# EAGLE board main (EAGLE 9.6.1)
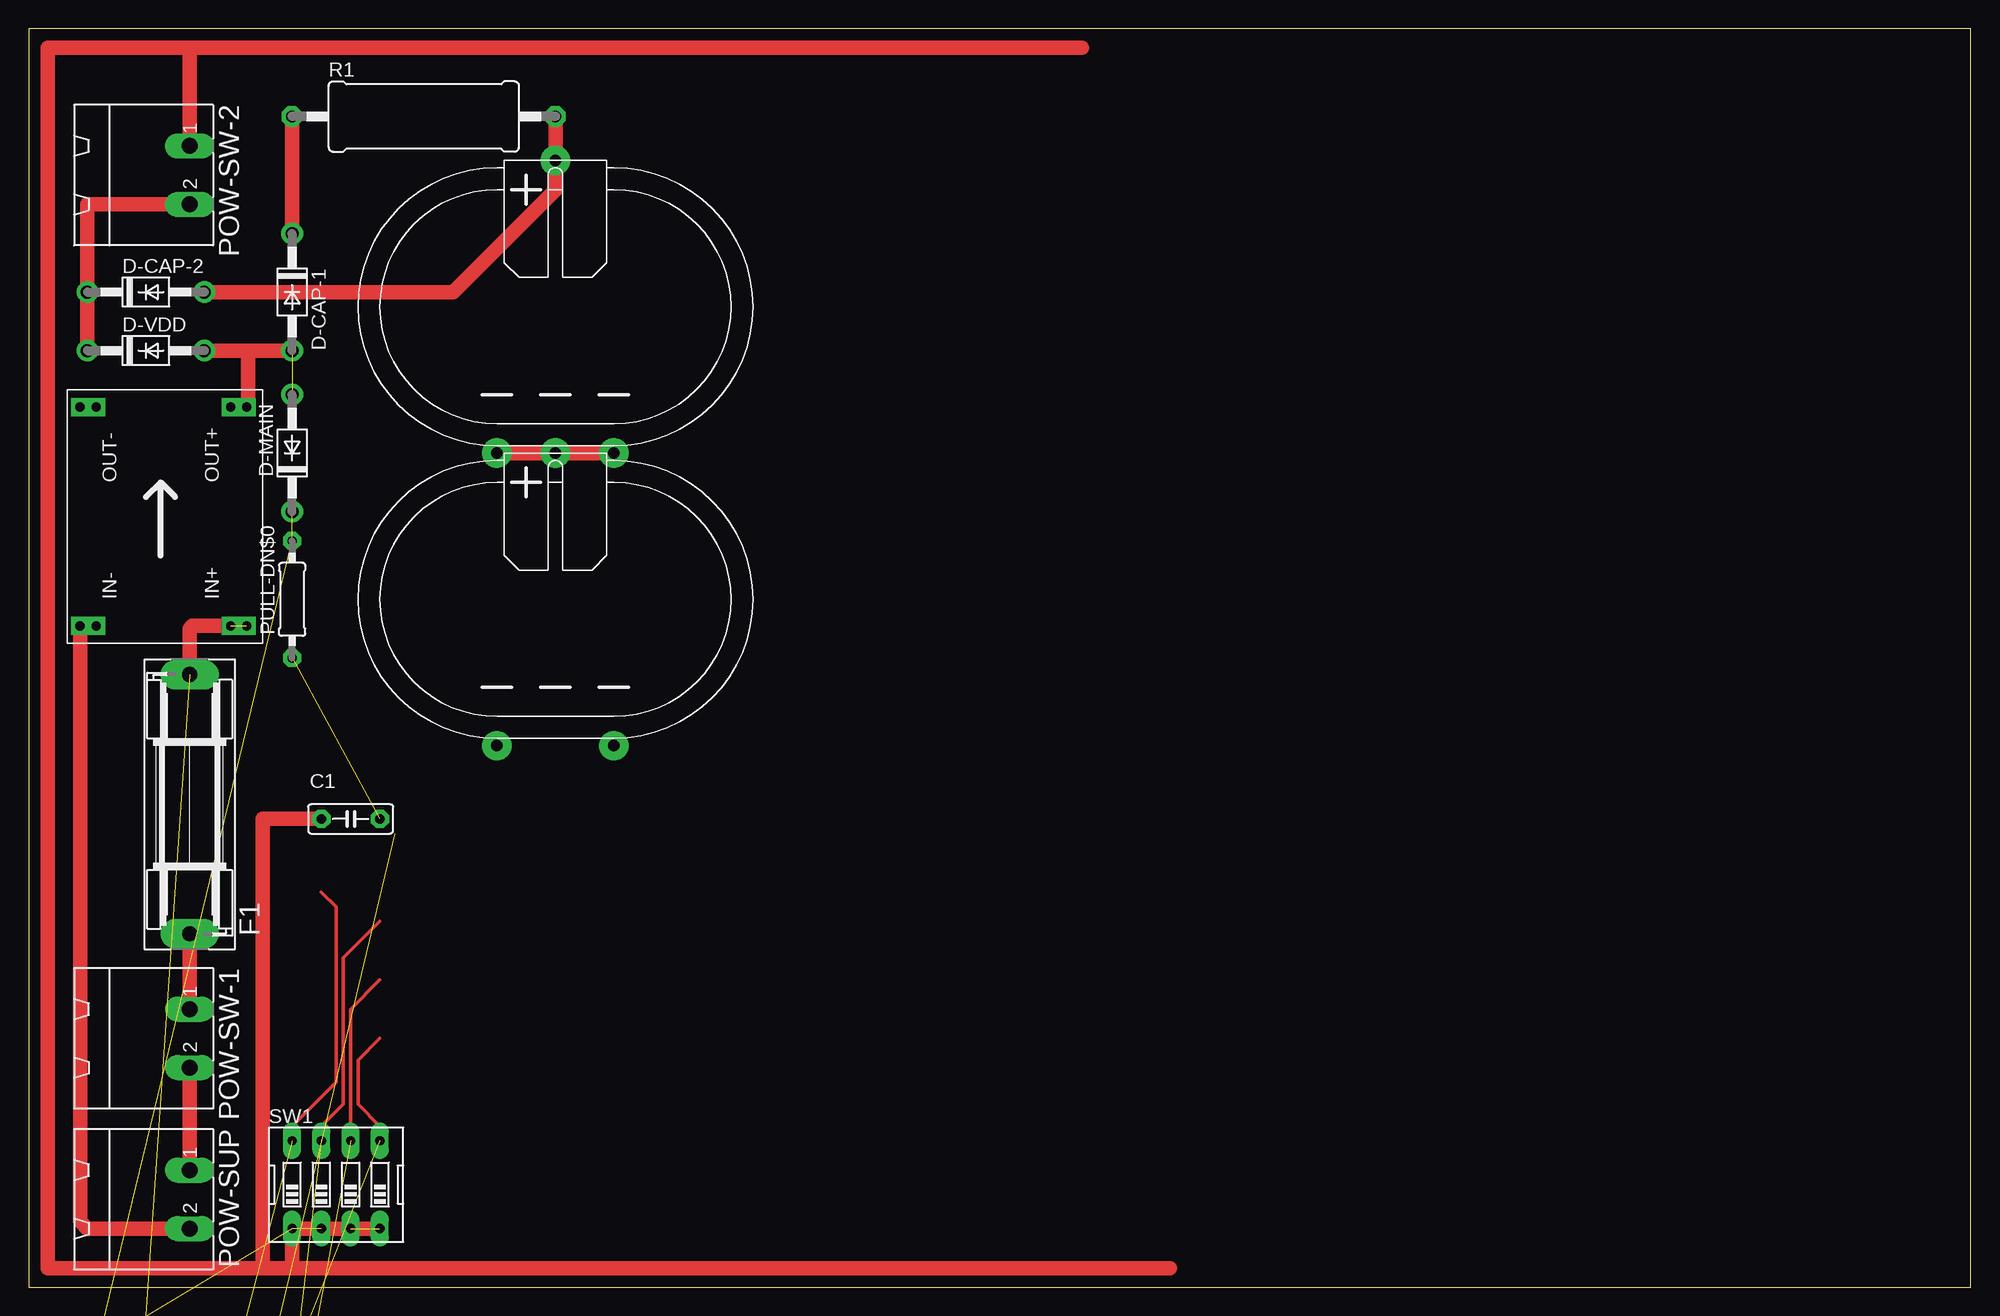
[diagram p0: board, top side]
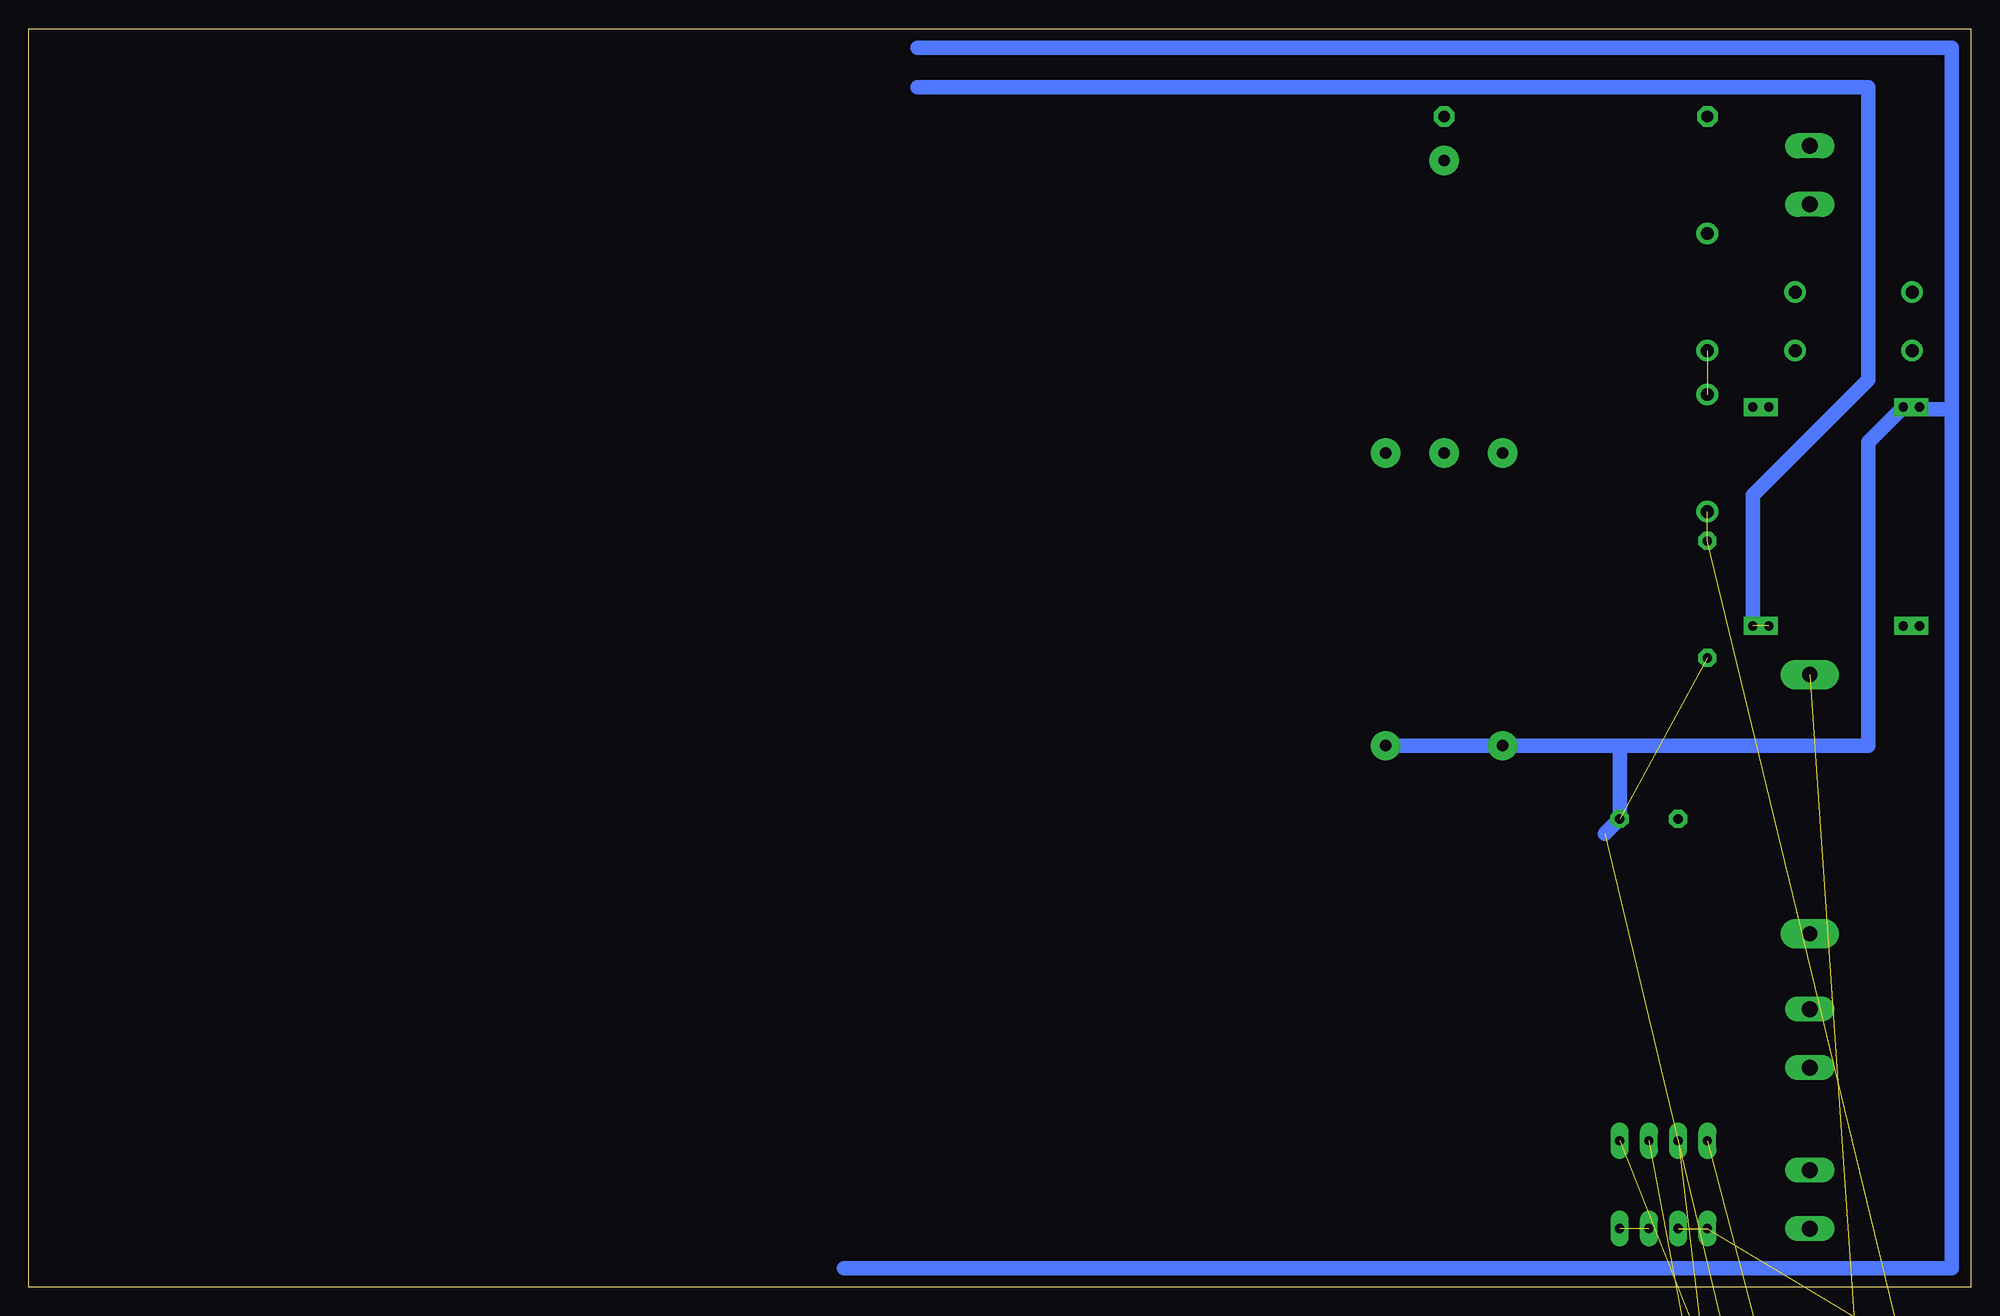
[diagram p1: board, bottom side, seen from below]

Size 168.58 x 109.21 mm. Coordinates in mm from the lower left corner, seen from the top.
Outline: 0,0 168.58,0 168.58,109.21 0,109.21 0,0
Copper layers (1*16): Top 0.035mm / dielectric 1.5mm / Bottom 0.035mm
Design rules "default *": minimum track width 6mil, minimum drill 0.35mm, track to track 6mil, track to pad 6mil, pad to pad 6mil, via to via 6mil, smd to smd 6mil, copper to edge 40mil, drill to drill 6mil, minimum pad ring 15mil, minimum via ring 8mil, stop-mask expansion 4mil, vias tented up to drill 0mil, thermal gap 10mil

## Footprints (pad centres in the part's own frame; a part is rotated, then mirrored left to right if it is on the bottom)
DIL16 = drill 0.813 long: 1 -8.89,-3.81; 2 -6.35,-3.81; 3 -3.81,-3.81; 4 -1.27,-3.81; 5 1.27,-3.81; 6 3.81,-3.81; 7 6.35,-3.81; 8 8.89,-3.81; 9 8.89,3.81; 10 6.35,3.81; 11 3.81,3.81; 12 1.27,3.81; 13 -1.27,3.81; 14 -3.81,3.81; 15 -6.35,3.81; 16 -8.89,3.81
E3,5-8 = drill 0.813 pad 1.6: + -1.778,0 | drill 0.813 pad 1.6 octagon: - 1.778,0
TO92 = drill 0.813 octagon: 1 1.27,0; 2 0,1.905; 3 -1.27,0
0207/12 = drill 0.813 octagon: 1 -6.35,0; 2 6.35,0
LI10 = drill 1.321 octagon: A -2.54,-5.08; E 2.54,-5.08; S 0,5.08
C050-025X075 = drill 0.813 octagon: 1 -2.54,0; 2 2.54,0
C025-025X050 = drill 0.813 octagon: 1 -1.27,0; 2 1.27,0
CK103X04 = drill 1.321 octagon: A -2.87,-2.87; A1 -2.845,-10.617; A2 -7.772,-7.772; A3 -10.617,-2.845; A4 -10.617,2.845; B 0,4.059; B1 -7.772,7.772; B2 -2.845,10.617; B3 2.845,10.617; B4 7.772,7.772; C 2.87,-2.87; C1 10.617,2.845; C2 10.617,-2.845; C3 7.772,-7.772; C4 2.845,-10.617
ML14 = drill 0.914 octagon: 1 -7.62,-1.27; 2 -7.62,1.27; 3 -5.08,-1.27; 4 -5.08,1.27; 5 -2.54,-1.27; 6 -2.54,1.27; 7 0,-1.27; 8 0,1.27; 9 2.54,-1.27; 10 2.54,1.27; 11 5.08,-1.27; 12 5.08,1.27; 13 7.62,-1.27; 14 7.62,1.27
DO35-10 = drill 0.813 long: A 5.08,0; C -5.08,0
DO41-10 = drill 1.118: A 5.08,0; C -5.08,0
0207/10 = drill 0.813 octagon: 1 -5.08,0; 2 5.08,0
SH22,5 = drill 1.321 pad 2.54 long: 1 -11.252,0; 2 11.252,0
DIL08 = drill 0.813 pad 1.27: 1 -3.81,-3.81; 2 -1.27,-3.81; 3 1.27,-3.81; 4 3.81,-3.81; 5 3.81,3.81; 6 1.27,3.81; 7 -1.27,3.81; 8 -3.81,3.81
DIL14 = drill 0.813 long: 1 -7.62,-3.81; 2 -5.08,-3.81; 3 -2.54,-3.81; 4 0,-3.81; 5 2.54,-3.81; 6 5.08,-3.81; 7 7.62,-3.81; 8 7.62,3.81; 9 5.08,3.81; 10 2.54,3.81; 11 0,3.81; 12 -2.54,3.81; 13 -5.08,3.81; 14 -7.62,3.81
VT400 = drill 0.8 pad 1.4: 1 -3.81,0; 2 3.81,0
MSTBA2 = drill 1.397 long: 1 -2.54,5.08; 2 2.54,5.08
LED5MM = drill 0.813 octagon: A -1.27,0; K 1.27,0
TO92-EBC = drill 0.813 long: B 0,-1.27; C -2.54,-1.27; E 2.54,-1.27
TC26V = drill 0.813: 1 -1.27,0; 2 1.27,0
0617/22 = drill 1.016 octagon: 1 -11.43,0; 2 11.43,0
RACON12 = drill 1.194 long: 1 -6.248,2.489; 2 6.248,2.489; 3 -6.248,-2.489; 4 6.248,-2.489
HVC90F = drill 1 pad 2.54: MINUS$1 -5.08,12.7; MINUS$2 5.08,12.7; PLUS$1 0,-12.7
EDG-04 = drill 0.813 long: 1 -3.81,-3.81; 2 -1.27,-3.81; 3 1.27,-3.81; 4 3.81,-3.81; 5 3.81,3.81; 6 1.27,3.81; 7 -1.27,3.81; 8 -3.81,3.81
TO92-CBE = drill 0.813 long: B 0,0; C -2.54,0; E 2.54,0
DC-BRICK = drill 0.8 square: IN1+ 1.5,1.4; IN1- 1.5,14.47; IN2+ 1.5,2.8; IN2- 1.5,15.87; OUT1+ 20.5,1.4; OUT1- 20.5,14.47; OUT2+ 20.5,2.8; OUT2- 20.5,15.87

## Placement (x,y rotation side)
12H-  4520N  [DIL16]  -39.37,-488.95 0 top  (outside the outline)
12H-CS-IC  4028N  [DIL16]  -39.37,-681.99 0 top  (outside the outline)
AUTORESET-C1  10uF  [E3,5-8]  -48.26,-252.73 0 top  (outside the outline)
AUTORESET-Q1  BC547  [TO92]  -49.53,-266.7 0 top  (outside the outline)
AUTORESET-R1  100K  [0207/12]  -44.45,-271.78 0 top  (outside the outline)
AUTORESET-R2  10K  [0207/12]  -44.45,-276.86 0 top  (outside the outline)
BRI-MAX  [LI10]  -45.72,-223.52 0 top  (outside the outline)
BRI-MIN  [LI10]  -45.72,-238.76 0 top  (outside the outline)
C1  100n  [C050-025X075]  27.94,40.64 0 top
C2  100n  [C050-025X075]  5.08,-31.75 0 top  (outside the outline)
C3  100n  [C050-025X075]  5.08,-36.83 0 top  (outside the outline)
C4  100n  [C050-025X075]  -36.83,-172.72 0 top  (outside the outline)
C5  100n  [C050-025X075]  -36.83,-203.2 0 top  (outside the outline)
C6  100n  [C050-025X075]  -48.26,-422.91 0 top  (outside the outline)
C7  100n  [C050-025X075]  -48.26,-430.53 0 top  (outside the outline)
C8  100n  [C050-025X075]  -48.26,-438.15 0 top  (outside the outline)
C9  100n  [C050-025X075]  -48.26,-533.4 0 top  (outside the outline)
C10  100n  [C050-025X075]  -48.26,-541.02 0 top  (outside the outline)
C11  100n  [C050-025X075]  -48.26,-548.64 0 top  (outside the outline)
C12  100n  [C050-025X075]  -48.26,-556.26 0 top  (outside the outline)
C13  100n  [C050-025X075]  -48.26,-563.88 0 top  (outside the outline)
C14  100n  [C050-025X075]  -48.26,-571.5 0 top  (outside the outline)
C15  100n  [C050-025X075]  -48.26,-704.85 0 top  (outside the outline)
C16  100n  [C050-025X075]  -48.26,-712.47 0 top  (outside the outline)
CLK-C1  10pf  [C025-025X050]  -5.08,-396.24 0 top  (outside the outline)
CLK-C2  10pf  [C025-025X050]  -49.53,-410.21 0 top  (outside the outline)
CLK-DIVIDER-1  4520N  [DIL16]  -39.37,-386.08 0 top  (outside the outline)
CLK-DIVIDER-2  4520N  [DIL16]  -16.51,-386.08 0 top  (outside the outline)
CLK-R1  10M  [0207/12]  -27.94,-408.94 0 top  (outside the outline)
CLK-R2  10M  [0207/12]  -12.7,-408.94 0 top  (outside the outline)
CLK-R3  330K  [0207/12]  -44.45,-417.83 0 top  (outside the outline)
CLK-SPEED-SELECTOR  [CK103X04]  -38.1,-361.95 0 top  (outside the outline)
CON-HAND-A  [ML14]  -38.1,-723.9 0 top  (outside the outline)
CON-HAND-B  [ML14]  -38.1,-736.6 0 top  (outside the outline)
CON-HAND-C  [ML14]  -38.1,-749.3 0 top  (outside the outline)
CON-SEC  [ML14]  -38.1,-594.36 0 top  (outside the outline)
CON-SEC1  [ML14]  -38.1,-621.03 0 top  (outside the outline)
CON-SEC2  [ML14]  -38.1,-633.73 0 top  (outside the outline)
D1  1N4148DO35-10  [DO35-10]  -33.02,-120.65 0 top  (outside the outline)
D2  1N4148DO35-10  [DO35-10]  -33.02,-127 0 top  (outside the outline)
D3  1N4148DO35-10  [DO35-10]  -33.02,-133.35 0 top  (outside the outline)
D4  1N4148DO35-10  [DO35-10]  -33.02,-139.7 0 top  (outside the outline)
D5  1N4148DO35-10  [DO35-10]  -33.02,-146.05 0 top  (outside the outline)
D6  1N4148DO35-10  [DO35-10]  -33.02,-152.4 0 top  (outside the outline)
D7  1N4148DO35-10  [DO35-10]  -33.02,-158.75 0 top  (outside the outline)
D8  1N4148DO35-10  [DO35-10]  -33.02,-165.1 0 top  (outside the outline)
D-CAP-1  1N4004  [DO41-10]  22.86,86.36 270 top
D-CAP-2  1N4004  [DO41-10]  10.16,86.36 0 top
D-MAIN  1N4004  [DO41-10]  22.86,72.39 90 top
D-VDD  1N4004  [DO41-10]  10.16,81.28 0 top
DIV$1  1K  [0207/10]  6.35,-74.93 0 top  (outside the outline)
DIV$2  1K  [0207/10]  -45.72,-210.82 0 top  (outside the outline)
DIV$3  1K  [0207/10]  -45.72,-215.9 0 top  (outside the outline)
F1  [SH22,5]  13.97,41.91 90 top
HOUR-  4518N  [DIL16]  -39.37,-477.52 0 top  (outside the outline)
HOUR-C  100n  [C025-025X050]  -43.18,-331.47 0 top  (outside the outline)
IC1  TL072P  [DIL08]  -33.02,-179.07 0 top  (outside the outline)
IC2  4071N  [DIL14]  11.43,-10.16 0 top  (outside the outline)
IC3  4081N  [DIL14]  11.43,-21.59 0 top  (outside the outline)
IC4  4071N  [DIL14]  11.43,-44.45 0 top  (outside the outline)
IC5  4001N  [DIL14]  -40.64,-580.39 0 top  (outside the outline)
IC9  4081N  [DIL14]  -40.64,-500.38 0 top  (outside the outline)
IC10  4071N  [DIL14]  -40.64,-511.81 0 top  (outside the outline)
IC11  4030N  [DIL14]  -40.64,-523.24 0 top  (outside the outline)
INVERTER-  4069N  [DIL14]  -40.64,-400.05 0 top  (outside the outline)
MIN-  4518N  [DIL16]  -39.37,-466.09 0 top  (outside the outline)
MIN-CS-IC  4028N  [DIL16]  -39.37,-670.56 0 top  (outside the outline)
PH1  VT43N1  [VT400]  -46.99,-199.39 0 top  (outside the outline)
POW-SUP  MSTBA2  [MSTBA2]  8.89,7.62 270 top
POW-SW-1  MSTBA2  [MSTBA2]  8.89,21.59 270 top
POW-SW-2  MSTBA2  [MSTBA2]  8.89,96.52 270 top
POWER-LED  [LED5MM]  -48.26,-260.35 0 top  (outside the outline)
POWER-LED-R  270  [0207/12]  -44.45,-281.94 0 top  (outside the outline)
PULL-DN$0  [0207/10]  22.86,59.69 90 top
PULL-DN$1  [0207/10]  6.35,-54.61 0 top  (outside the outline)
PULL-DN$2  [0207/10]  6.35,-59.69 0 top  (outside the outline)
PULL-DN$3  [0207/10]  6.35,-64.77 0 top  (outside the outline)
PULL-DN$4  [0207/10]  6.35,-69.85 0 top  (outside the outline)
PWR-TRI-R  1K  [0207/10]  -45.72,-650.24 0 top  (outside the outline)
PWR-TRI-R1  1K  [0207/10]  -45.72,-662.94 0 top  (outside the outline)
PWR-TRI-R2  1K  [0207/10]  -45.72,-699.77 0 top  (outside the outline)
Q1  BC557  [TO92-EBC]  -5.08,-100.33 0 top  (outside the outline)
Q8  32768Hz  [TC26V]  -41.91,-408.94 0 top  (outside the outline)
R1  [0617/22]  34.29,101.6 0 top
R2  570K  [0207/12]  -26.67,-330.2 0 top  (outside the outline)
R4  570K  [0207/12]  -44.45,-339.09 0 top  (outside the outline)
R$1  180  [0207/10]  -11.43,-110.49 0 top  (outside the outline)
R$2  180  [0207/10]  -11.43,-115.57 0 top  (outside the outline)
R$3  4K  [0207/10]  -34.29,-187.96 0 top  (outside the outline)
R$4  4K  [0207/10]  -34.29,-193.04 0 top  (outside the outline)
R$5  4K  [0207/10]  -34.29,-198.12 0 top  (outside the outline)
RESET-C  100n  [C025-025X050]  -36.83,-331.47 0 top  (outside the outline)
S-HOUR  RACON12  [RACON12]  -43.18,-292.1 0 top  (outside the outline)
S-MIN  RACON12  [RACON12]  -25.4,-292.1 0 top  (outside the outline)
S-MIN-C  100n  [C025-025X050]  -19.05,-317.5 0 top  (outside the outline)
S-MIN-R  570K  [0207/12]  -29.21,-339.09 0 top  (outside the outline)
S-RESET  RACON12  [RACON12]  -43.18,-307.34 0 top  (outside the outline)
S-SCHMITT  40106N  [DIL14]  -40.64,-321.31 0 top  (outside the outline)
S-SEC  RACON12  [RACON12]  -25.4,-307.34 0 top  (outside the outline)
S-SEC-C  100n  [C025-025X050]  -27.94,-317.5 0 top  (outside the outline)
S-SEC-R  570K  [0207/12]  -44.45,-344.17 0 top  (outside the outline)
SEC-  4518N  [DIL16]  -39.37,-454.66 0 top  (outside the outline)
SUPER-C1  HVC90F  [HVC90F]  45.72,85.09 180 top
SUPER-C2  HVC90F  [HVC90F]  45.72,59.69 180 top
SW1  [EDG-04]  26.67,8.89 0 top
T1  [TO92-CBE]  -13.97,-101.6 0 top  (outside the outline)
T2  [TO92-CBE]  -48.26,-643.89 0 top  (outside the outline)
T3  [TO92-CBE]  -48.26,-656.59 0 top  (outside the outline)
T4  [TO92-CBE]  -48.26,-693.42 0 top  (outside the outline)
TRI-FALL  [LI10]  -35.56,-107.95 0 top  (outside the outline)
TRI-RISE  [LI10]  -24.13,-107.95 0 top  (outside the outline)
U$1  MP1584  [DC-BRICK]  20.32,55.88 90 top

## Library data of the parts
12H- CLK-DIVIDER-1 CLK-DIVIDER-2 HOUR- MIN- SEC- = 45xx
12H-CS-IC IC2-IC5 IC9-IC11 INVERTER- MIN-CS-IC S-SCHMITT = 40xx
AUTORESET-C1 C1-C16 CLK-C1 CLK-C2 HOUR-C RESET-C S-MIN-C S-SEC-C = rcl; SPICEPREFIX: C
AUTORESET-Q1 = transistor-npn
AUTORESET-R1 AUTORESET-R2 CLK-R1-CLK-R3 DIV$1-DIV$3 POWER-LED-R PULL-DN$0 PULL-DN$1-PULL-DN$4 PWR-TRI-R PWR-TRI-R1 PWR-TRI-R2 R1 R2 R4 R$1-R$5 S-MIN-R S-SEC-R = rcl; SPICEPREFIX: R
BRI-MAX BRI-MIN TRI-FALL TRI-RISE = pot
CLK-SPEED-SELECTOR = switch
CON-HAND-A CON-HAND-B CON-HAND-C CON-SEC CON-SEC1 CON-SEC2 = con-harting-ml; OC_FARNELL: unknown; OC_NEWARK: unknown
D1-D8 D-CAP-1 D-CAP-2 D-MAIN D-VDD = diode
F1 = fuse; MF: SCHURTER; MPN: 0031.8201; OC_FARNELL: 1162740; OC_NEWARK: 96F8317
IC1 = linear
PH1 = photo-elements
POW-SUP POW-SW-1 POW-SW-2 = con-phoenix-508; MF: FARNELL; MPN: 1757242; OC_FARNELL: 3705171; OC_NEWARK: 71C4161
POWER-LED = led
Q1 = transistor-pnp
Q8 = crystal
S-HOUR S-MIN S-RESET S-SEC = switch-misc
SUPER-C1 SUPER-C2 = HVC90F
SW1 = special
T1-T4 = transistor
U$1 = MP1584-dc-brick

## Nets
0.5HZ: CLK-DIVIDER-2.14
0V-EXT: POW-SUP.2 U$1.IN1- U$1.IN2-
1HZ: CLK-DIVIDER-2.13 CLK-SPEED-SELECTOR.A2 IC2.8
2HZ: CLK-DIVIDER-2.12 CLK-SPEED-SELECTOR.A3
4HZ: CLK-DIVIDER-2.11 CLK-SPEED-SELECTOR.A4
8HZ: CLK-DIVIDER-2.6 CLK-DIVIDER-2.10 CLK-SPEED-SELECTOR.B1
9V: CON-SEC1.14 CON-SEC2.14 CON-SEC.14 F1.2 U$1.IN1+ U$1.IN2+
9V-EXT: POW-SUP.1 POW-SW-1.2
9V-IN: F1.1 POW-SW-1.1
12H-A: 12H-.3 12H-CS-IC.10
12H-B: 12H-.4 12H-CS-IC.13
12H-C: 12H-.5 IC9.12
12H-CS-A: 12H-CS-IC.3
12H-CS-B: 12H-CS-IC.14
12H-CS-C: 12H-CS-IC.2
12H-D: 12H-.6 IC9.13
16HZ: CLK-DIVIDER-2.5 CLK-SPEED-SELECTOR.B2
32HZ: CLK-DIVIDER-2.4 CLK-SPEED-SELECTOR.B3
64HZ: CLK-DIVIDER-2.3 CLK-SPEED-SELECTOR.B4
128HZ: CLK-DIVIDER-1.14 CLK-DIVIDER-2.2 CLK-SPEED-SELECTOR.C1
256HZ: CLK-DIVIDER-1.13 CLK-SPEED-SELECTOR.C2
512HZ: CLK-DIVIDER-1.12 CLK-SPEED-SELECTOR.C3
1024HZ: CLK-DIVIDER-1.11 CLK-SPEED-SELECTOR.C4
2048HZ: CLK-DIVIDER-1.6 CLK-DIVIDER-1.10
4096HZ: CLK-DIVIDER-1.5
8192HZ: CLK-DIVIDER-1.4
16384HZ: CLK-DIVIDER-1.3
ALW: IC2.2 IC4.3
AUTO-R: AUTORESET-Q1.3 AUTORESET-R2.2 IC2.13
BLI: IC2.9 IC4.10
BRI: IC2.6 IC4.4
BRI-REF: BRI-MIN.E IC1.6 PH1.2
BTN-HOUR: IC11.9 S-SCHMITT.6
BTN-MIN: IC11.6 S-SCHMITT.4
BTN-RESET: IC2.12 S-SCHMITT.8
BTN-SEC: IC11.2 S-SCHMITT.2
CLK: CLK-SPEED-SELECTOR.A CLK-SPEED-SELECTOR.B CLK-SPEED-SELECTOR.C IC11.1
CLK-C2-R3: CLK-C2.1 CLK-R3.2 Q8.2
COL: IC3.4
GND-7SEG: CON-SEC1.10 CON-SEC1.13 CON-SEC2.10 CON-SEC2.13 CON-SEC.10 CON-SEC.13 T3.C
GND-HAND: 12H-CS-IC.8 12H-CS-IC.11 12H-CS-IC.12 C15.2 C16.2 MIN-CS-IC.8 MIN-CS-IC.11 T4.C
GND-TRI: C4.2 C5.2 D4.C DIV$3.1 IC1.4 R$2.1 R$4.1 T2.C
HOUR-ONE-A: CON-SEC2.8 HOUR-.3
HOUR-ONE-B: CON-SEC2.6 HOUR-.4
HOUR-ONE-C: CON-SEC2.4 HOUR-.5 IC9.8
HOUR-ONE-D: CON-SEC2.2 HOUR-.6 HOUR-.10
HOUR-TEN-A: CON-SEC2.7 HOUR-.11 IC5.1
HOUR-TEN-B: CON-SEC2.5 HOUR-.12 IC5.2 IC9.9
HOUR-TEN-CD: CON-SEC2.1 CON-SEC2.3 IC3.10
MAIN: D-MAIN.C IC2.1 PULL-DN$0.2
MIN-CS-A: MIN-CS-IC.3
MIN-CS-B: MIN-CS-IC.14
MIN-CS-C: MIN-CS-IC.2
MIN-CS-D: MIN-CS-IC.15
MIN-CS-E: MIN-CS-IC.1
MIN-CS-F: MIN-CS-IC.6
MIN-ONE-A: CON-SEC1.8 MIN-.3
MIN-ONE-B: CON-SEC1.6 MIN-.4
MIN-ONE-C: CON-SEC1.4 MIN-.5
MIN-ONE-D: CON-SEC1.2 MIN-.6 MIN-.10
MIN-TEN-A: CON-SEC1.7 MIN-.11 MIN-CS-IC.10
MIN-TEN-B: CON-SEC1.5 IC9.5 MIN-.12 MIN-CS-IC.13
MIN-TEN-C: CON-SEC1.3 IC9.6 MIN-.13 MIN-CS-IC.12
MIN-TEN-D: CON-SEC1.1 MIN-.14
N$1: IC4.12 IC4.13 PULL-DN$3.2 SW1.8
N$2: IC4.8 IC4.9 PULL-DN$2.2 SW1.7
N$3: IC4.5 IC4.6 PULL-DN$1.2 SW1.6
N$4: D-CAP-1.A D-MAIN.A D-VDD.A U$1.OUT1+ U$1.OUT2+
N$5: D-CAP-1.C R1.1
N$6: D-CAP-2.A R1.2 SUPER-C1.PLUS$1
N$7: SUPER-C1.MINUS$1 SUPER-C1.MINUS$2 SUPER-C2.PLUS$1
N$8: IC4.1 IC4.2 PULL-DN$4.2 SW1.5
N$9: IC2.4 IC3.2
N$10: IC2.10 IC3.6
N$14: D1.C D2.A
N$15: IC1.3 R$3.1 R$4.2 R$5.2
N$16: D2.C DIV$1.2 Q1.B
N$17: D3.A DIV$1.1 T1.B
N$18: R$1.1 TRI-RISE.E
N$19: T1.E TRI-FALL.E
N$20: Q1.E TRI-RISE.S
N$21: R$2.2 TRI-FALL.S
N$23: D6.C D8.C T1.C
N$24: D5.A D7.A Q1.C
N$25: D3.C D4.A
N$26: BRI-MAX.E DIV$2.1
N$27: BRI-MAX.S PH1.1
N$28: BRI-MIN.S DIV$3.2
N$29: D5.C D8.A IC1.1 R$5.1
N$31: S-SCHMITT.1 S-SEC-C.2 S-SEC-R.1 S-SEC.1
N$32: S-MIN-C.2 S-MIN-R.1 S-MIN.1 S-SCHMITT.3
N$33: HOUR-C.2 R4.1 S-HOUR.1 S-SCHMITT.5
N$37: RESET-C.1 S-RESET.3
N$38: S-MIN-C.1 S-MIN.3
N$40: R2.1 RESET-C.2 S-RESET.1 S-SCHMITT.9
N$41: PWR-TRI-R.1 T2.B
N$43: PWR-TRI-R1.1 T3.B
N$44: PWR-TRI-R2.1 T4.B
N$46: CLK-DIVIDER-1.2 INVERTER-.4
N$49: 12H-.7 IC10.11
N$50: IC9.10 IC10.8
N$51: IC9.3 IC10.1 IC11.5
N$52: IC10.2 IC10.4 MIN-.7 MIN-.15
N$53: IC9.4 IC10.5 IC11.8
N$54: IC9.11 IC10.13
N$55: HOUR-.7 HOUR-.15 IC10.6 IC10.10
N$56: IC11.3 SEC-.2
N$57: IC10.3 SEC-.7 SEC-.15
N$58: CLK-R1.1 CLK-R2.2
N$59: IC11.4 MIN-.2
N$60: 12H-.2 HOUR-.2 IC11.10
N$72: AUTORESET-C1.+ AUTORESET-Q1.2 AUTORESET-R1.2
N$84: IC3.9 IC5.3
N$97: POWER-LED-R.2 POWER-LED.A
N-BL: CON-SEC1.11 CON-SEC2.11 CON-SEC.11 IC3.3 IC3.5
PWM: IC1.7 IC2.5
PWR: IC2.3 IC3.1 PWR-TRI-R1.2 PWR-TRI-R2.2 PWR-TRI-R.2
RESET: IC2.11 IC10.9 IC10.12
SEC-ONE-A: CON-SEC.8 SEC-.3
SEC-ONE-B: CON-SEC.6 SEC-.4
SEC-ONE-C: CON-SEC.4 SEC-.5
SEC-ONE-D: CON-SEC.2 SEC-.6 SEC-.10
SEC-TEN-A: CON-SEC.7 SEC-.11
SEC-TEN-B: CON-SEC.5 IC9.1 SEC-.12
SEC-TEN-C: CON-SEC.3 IC9.2 SEC-.13
SEC-TEN-D: CON-SEC.1 SEC-.14
SIGNAL-CLK-XTAL-1: CLK-C1.1 CLK-R1.2 INVERTER-.1 Q8.1
SIGNAL-CLK-XTAL-2: CLK-R2.1 CLK-R3.1 INVERTER-.2 INVERTER-.3
TRI-WAVE: C4.1 D6.A D7.C IC1.2 IC1.5
VDD: 12H-.16 12H-CS-IC.16 AUTORESET-R1.1 AUTORESET-R2.1 C1.1 C2.1 C3.1 C5.1 C6.1 C7.1 C8.1 C9.1 C10.1 C11.1 C12.1 C13.1 C14.1 C15.1 C16.1 CLK-DIVIDER-1.16 CLK-DIVIDER-2.16 CON-SEC1.9 CON-SEC1.12 CON-SEC2.9 CON-SEC2.12 CON-SEC.9 CON-SEC.12 D1.A DIV$2.2 HOUR-.16 HOUR-C.1 IC1.8 IC2.14 IC3.14 IC4.14 IC5.14 IC9.14 IC10.14 IC11.14 INVERTER-.14 MIN-.16 MIN-CS-IC.16 POW-SW-2.1 POWER-LED-R.1 R$1.2 R$3.2 S-HOUR.3 S-SCHMITT.14 S-SEC-C.1 S-SEC.3 SEC-.16 SW1.1 SW1.2 SW1.3 SW1.4
VDD-IN: D-CAP-2.C D-VDD.C POW-SW-2.2
VSS: 12H-.8 AUTORESET-C1.- AUTORESET-Q1.1 C1.2 C2.2 C3.2 C6.2 C7.2 C8.2 C9.2 C10.2 C11.2 C12.2 C13.2 C14.2 CLK-C1.2 CLK-C2.2 CLK-DIVIDER-1.1 CLK-DIVIDER-1.7 CLK-DIVIDER-1.8 CLK-DIVIDER-1.9 CLK-DIVIDER-1.15 CLK-DIVIDER-2.1 CLK-DIVIDER-2.7 CLK-DIVIDER-2.8 CLK-DIVIDER-2.9 CLK-DIVIDER-2.15 CLK-SPEED-SELECTOR.A1 HOUR-.1 HOUR-.8 HOUR-.9 IC2.7 IC3.7 IC4.7 IC5.7 IC9.7 IC10.7 IC11.7 INVERTER-.7 MIN-.1 MIN-.8 MIN-.9 POWER-LED.K PULL-DN$0.1 PULL-DN$1.1 PULL-DN$2.1 PULL-DN$3.1 PULL-DN$4.1 R2.2 R4.2 S-MIN-R.2 S-SCHMITT.7 S-SEC-R.2 SEC-.1 SEC-.8 SEC-.9 SUPER-C2.MINUS$1 SUPER-C2.MINUS$2 T2.E T3.E T4.E U$1.OUT1- U$1.OUT2-
ZER: IC3.8 IC4.11

## Tracks (layer width: path | path; a pad name or v marks a point on that pad's centre or on a via)
0V-EXT
  Top 1.27: U$1.IN1- U$1.IN2- 4.45,5.71 5.08,5.08 POW-SUP.2
1HZ  (2 unrouted)
2HZ  (1 unrouted)
4HZ  (1 unrouted)
8HZ  (2 unrouted)
9V  (4 unrouted)
  Top 1.27: F1.2 13.97,57.15 14.2,57.38 U$1.IN1+
  Bottom 1.27: U$1.IN1+ 18.92,68.71 8.89,78.74 8.89,104.14 91.44,104.14
9V-EXT
  Top 1.27: POW-SUP.1 POW-SW-1.2
9V-IN
  Top 1.27: POW-SW-1.1 F1.1
12H-A  (1 unrouted)
12H-B  (1 unrouted)
12H-C  (1 unrouted)
12H-D  (1 unrouted)
16HZ  (1 unrouted)
32HZ  (1 unrouted)
64HZ  (1 unrouted)
128HZ  (2 unrouted)
256HZ  (1 unrouted)
512HZ  (1 unrouted)
1024HZ  (1 unrouted)
2048HZ  (1 unrouted)
ALW  (1 unrouted)
AUTO-R  (2 unrouted)
BLI  (1 unrouted)
BRI  (1 unrouted)
BRI-REF  (2 unrouted)
BTN-HOUR  (1 unrouted)
BTN-MIN  (1 unrouted)
BTN-RESET  (1 unrouted)
BTN-SEC  (1 unrouted)
CLK  (3 unrouted)
CLK-C2-R3  (2 unrouted)
GND-7SEG  (6 unrouted)
GND-HAND  (7 unrouted)
GND-TRI  (7 unrouted)
HOUR-ONE-A  (1 unrouted)
HOUR-ONE-B  (1 unrouted)
HOUR-ONE-C  (2 unrouted)
HOUR-ONE-D  (2 unrouted)
HOUR-TEN-A  (2 unrouted)
HOUR-TEN-B  (3 unrouted)
HOUR-TEN-CD  (2 unrouted)
MAIN  (2 unrouted)
MIN-ONE-A  (1 unrouted)
MIN-ONE-B  (1 unrouted)
MIN-ONE-C  (1 unrouted)
MIN-ONE-D  (2 unrouted)
MIN-TEN-A  (2 unrouted)
MIN-TEN-B  (3 unrouted)
MIN-TEN-C  (3 unrouted)
MIN-TEN-D  (1 unrouted)
N$1  (3 unrouted)
  Top 0.305: SW1.8 22.86,13.97 26.67,17.78 26.67,33.02 25.4,34.29
N$2  (3 unrouted)
  Top 0.305: SW1.7 25.4,13.97 27.3,15.88 27.3,28.57 30.48,31.75
N$3  (3 unrouted)
  Top 0.305: SW1.6 27.94,24.13 30.48,26.67
N$4  (1 unrouted)
  Top 1.27: D-VDD.A 19.05,81.28 | 19.05,81.28 D-CAP-1.A | U$1.OUT2+ U$1.OUT1+ 19.05,76.51 19.05,81.28
N$5
  Top 1.27: R1.1 D-CAP-1.C
N$6
  Top 1.27: R1.2 SUPER-C1.PLUS$1 45.72,95.25 36.83,86.36 D-CAP-2.A
N$7
  Top 1.27: SUPER-C1.MINUS$1 SUPER-C2.PLUS$1 SUPER-C1.MINUS$2
N$8  (3 unrouted)
  Top 0.305: SW1.5 30.48,13.97 28.57,15.88 28.57,19.68 30.48,21.59
N$9  (1 unrouted)
N$10  (1 unrouted)
N$14  (1 unrouted)
N$15  (3 unrouted)
N$16  (2 unrouted)
N$17  (2 unrouted)
N$18  (1 unrouted)
N$19  (1 unrouted)
N$20  (1 unrouted)
N$21  (1 unrouted)
N$23  (2 unrouted)
N$24  (2 unrouted)
N$25  (1 unrouted)
N$26  (1 unrouted)
N$27  (1 unrouted)
N$28  (1 unrouted)
N$29  (3 unrouted)
N$31  (3 unrouted)
N$32  (3 unrouted)
N$33  (3 unrouted)
N$37  (1 unrouted)
N$38  (1 unrouted)
N$40  (3 unrouted)
N$41  (1 unrouted)
N$43  (1 unrouted)
N$44  (1 unrouted)
N$46  (1 unrouted)
N$49  (1 unrouted)
N$50  (1 unrouted)
N$51  (2 unrouted)
N$52  (3 unrouted)
N$53  (2 unrouted)
N$54  (1 unrouted)
N$55  (3 unrouted)
N$56  (1 unrouted)
N$57  (2 unrouted)
N$58  (1 unrouted)
N$59  (1 unrouted)
N$60  (2 unrouted)
N$72  (2 unrouted)
N$84  (1 unrouted)
N$97  (1 unrouted)
N-BL  (4 unrouted)
PWM  (1 unrouted)
PWR  (4 unrouted)
RESET  (2 unrouted)
SEC-ONE-A  (1 unrouted)
SEC-ONE-B  (1 unrouted)
SEC-ONE-C  (1 unrouted)
SEC-ONE-D  (2 unrouted)
SEC-TEN-A  (1 unrouted)
SEC-TEN-B  (2 unrouted)
SEC-TEN-C  (2 unrouted)
SEC-TEN-D  (1 unrouted)
SIGNAL-CLK-XTAL-1  (3 unrouted)
SIGNAL-CLK-XTAL-2  (3 unrouted)
TRI-WAVE  (4 unrouted)
VDD  (51 unrouted)
  Top 1.27: POW-SW-2.1 13.97,107.56 | 13.97,107.56 91.44,107.56 | 13.97,107.56 1.65,107.56 1.65,1.65 20.32,1.65 | 20.32,1.65 22.86,1.65 | 22.86,1.65 99.06,1.65 | SW1.4 SW1.1 22.86,1.65 | 20.32,1.65 20.32,21.59 20.32,40.64 C1.1
VDD-IN
  Top 1.27: D-VDD.C D-CAP-2.C 5.08,93.98 POW-SW-2.2
VSS  (58 unrouted)
  Bottom 1.27: 91.44,107.56 1.65,107.56 1.65,76.2 | 1.65,76.2 1.65,1.65 97.79,1.65 | SUPER-C2.MINUS$1 SUPER-C2.MINUS$2 30.48,46.99 | 30.48,46.99 22.86,46.99 8.89,46.99 8.89,73.34 U$1.OUT1- U$1.OUT2- 4.27,76.2 1.65,76.2 | 30.48,46.99 C1.2 31.75,39.37
ZER  (1 unrouted)